# EAGLE board HSTF 2018 - Eagle - V01 (EAGLE 8.5.2)
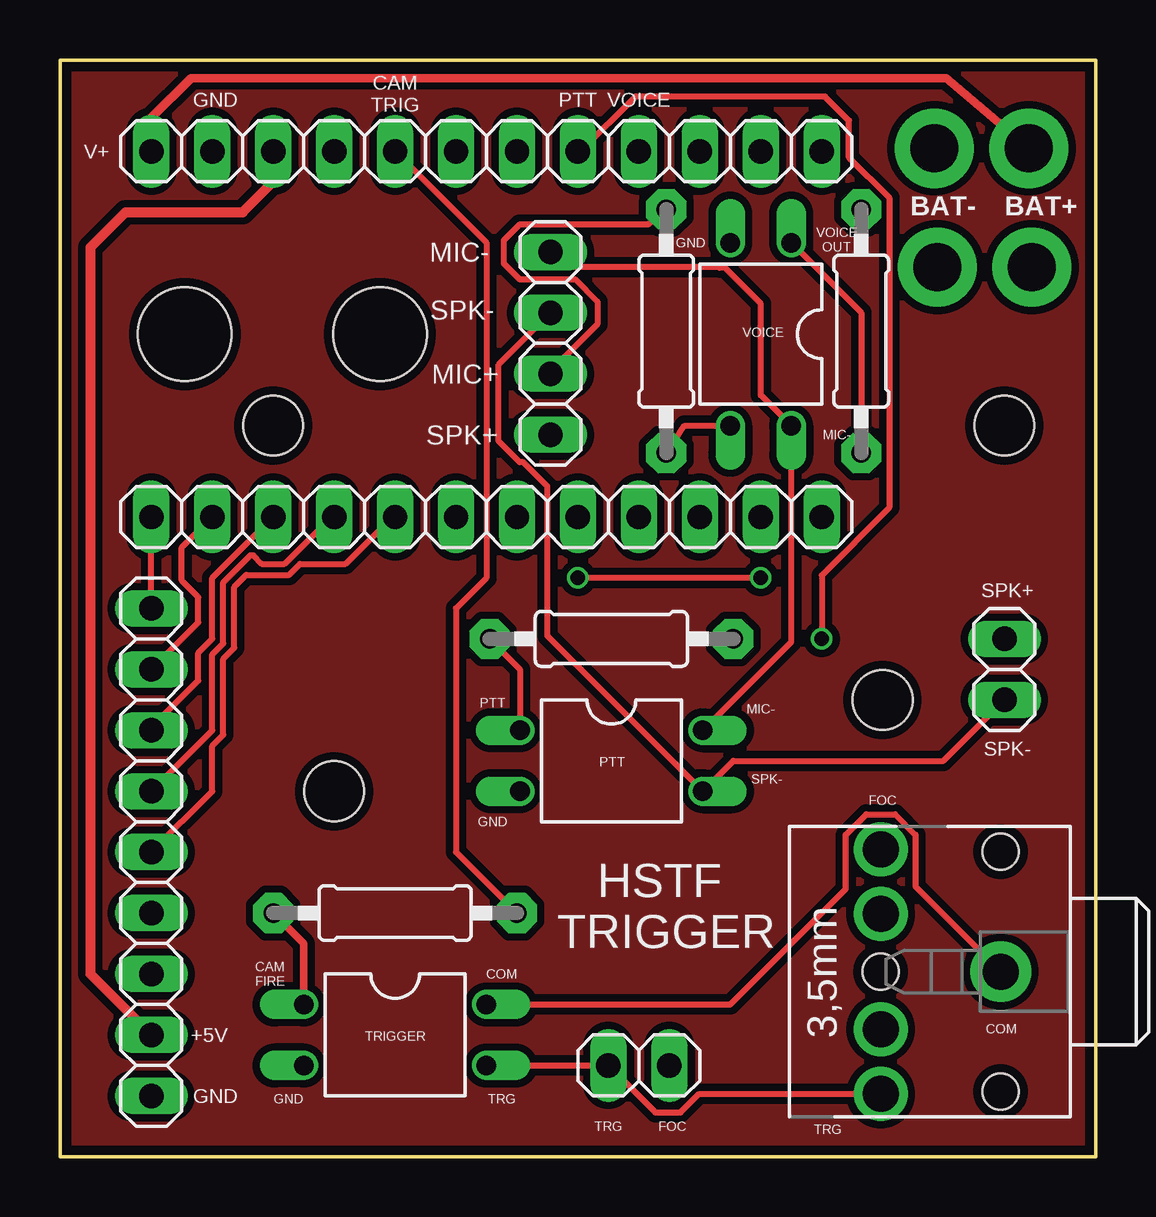
[diagram p0: board, top side]
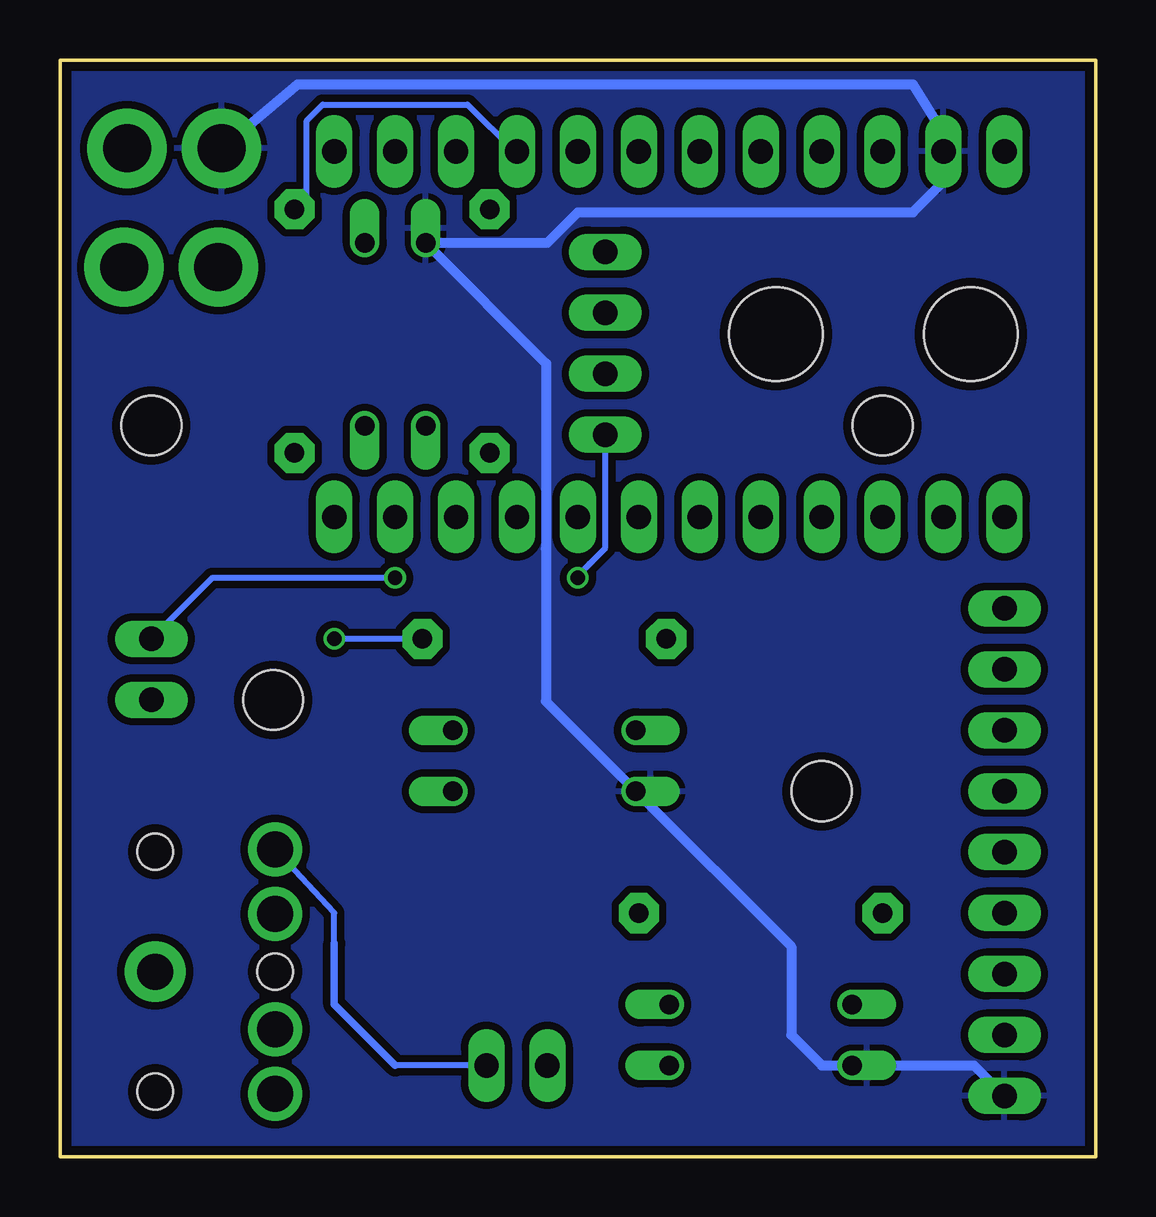
[diagram p1: board, bottom side, seen from below]

Size 43.18 x 45.72 mm. Coordinates in mm from the lower left corner, seen from the top.
Outline: 43.18,0 0,0 0,45.72 43.18,45.72 43.18,0
Copper layers (1*16): Top 0.035559375mm / dielectric 1.6mm / Bottom 0.035559375mm
Design rules "oshpark-2layer": minimum track width 6mil, minimum drill 10mil, track to track 6mil, track to pad 6mil, pad to pad 6mil, via to via 6mil, smd to smd 6mil, copper to edge 15mil, drill to drill 6mil, minimum pad ring 5mil, minimum via ring 5mil, stop-mask expansion 2.5mil, vias tented up to drill 0mil, thermal gap 10mil
Holes 3.9 mm at 5.21,34.29 13.34,34.29
Holes 2.49 mm at 11.43,15.24 34.29,19.05 39.37,30.48 8.89,30.48

## Footprints (pad centres in the part's own frame; a part is rotated, then mirrored left to right if it is on the bottom)
1X01_2MM = drill 2 pad 3.302: 1 0,0
STX3100 = drill 1.5 pad 2.54: 1 2.7,-0.1 | drill 1.5: 2 7.7,5; 3 7.7,2.3; 4 7.7,-2.5; 5 7.7,-5.2 | hole 1.5: 2.7,4.9; 2.7,-5.1; 7.7,-0.1
1X02 = drill 1.016 long: 1 -1.27,0; 2 1.27,0
1X09 = drill 1.016 long: 1 -10.16,0; 2 -7.62,0; 3 -5.08,0; 4 -2.54,0; 5 0,0; 6 2.54,0; 7 5.08,0; 8 7.62,0; 9 10.16,0
1X12 = drill 1.016 long: 1 -13.97,0; 2 -11.43,0; 3 -8.89,0; 4 -6.35,0; 5 -3.81,0; 6 -1.27,0; 7 1.27,0; 8 3.81,0; 9 6.35,0; 10 8.89,0; 11 11.43,0; 12 13.97,0
DIL04 = drill 0.813 offset: 1 -1.27,-3.81; 2 1.27,-3.81; 3 1.27,3.81; 4 -1.27,3.81
0207/10 = drill 0.813 pad 1.676 octagon: 1 -5.08,0; 2 5.08,0
1X04 = drill 1.016 long: 1 -3.81,0; 2 -1.27,0; 3 1.27,0; 4 3.81,0

## Placement (x,y rotation side)
BAT+  [1X01_2MM]  40.39,42.04 270 top
BAT-  [1X01_2MM]  36.45,42.04 270 top
CAMERA_CABLE  STEREOJACK  [STX3100]  41.91,7.62 180 top
DTMF_AUDIO_IN  Female  [1X02]  39.37,20.32 270 top
DTMF_MODULE  Female  [1X09]  3.81,12.7 270 top
FOCUS_SW  Female  [1X02]  24.13,3.81 180 top
LEFT  [1X12]  17.78,26.67 0 top
PTT  PC817  [DIL04]  22.99,16.51 270 top
R1  220  [0207/10]  13.97,10.16 180 top
R2  220  [0207/10]  22.99,21.59 180 top
R3  220  [0207/10]  33.4,34.42 270 top
R4  2.2K  [0207/10]  25.27,34.42 270 top
RADIO  Female  [1X04]  20.45,33.91 90 top
RIGHT  [1X12]  17.78,41.91 0 top
STRAIN  [1X01_2MM]  40.51,37.08 90 top
STRAIN1  [1X01_2MM]  36.58,37.08 90 top
TRIGGER  PC817  [DIL04]  13.97,5.08 270 top
VOICE  PC817  [DIL04]  29.21,34.29 180 top

## Library data of the parts
BAT+ BAT- STRAIN STRAIN1 = SparkFun-Connectors
CAMERA_CABLE R1-R4 = adafruit
DTMF_AUDIO_IN DTMF_MODULE FOCUS_SW RADIO = pinhead
LEFT RIGHT = pinhead; SPICEPREFIX: X
PTT TRIGGER VOICE = optocoupler; MPN: PC817X4J000F; OC_FARNELL: 9707727; OC_NEWARK: 97K7059

## Nets
5: RIGHT.7
6: RIGHT.6
COMMON: CAMERA_CABLE.1 TRIGGER.4
FOCUS: CAMERA_CABLE.5 FOCUS_SW.1
GND: BAT-.1 DTMF_MODULE.9 PTT.2 RIGHT.2 TRIGGER.2 VOICE.2
MIC+: R4.1 RADIO.2
MIC-: PTT.4 RADIO.4 VOICE.4
N$1: LEFT.6
N$2: LEFT.7
N$3: LEFT.8
N$4: LEFT.9
N$5: LEFT.10
N$9: R3.2 VOICE.1
N$10: PTT.1 R2.2
N$12: R4.2 VOICE.3
N$13: LEFT.11
N$14: LEFT.12
N$22: RIGHT.10
N$23: RIGHT.11
N$24: RIGHT.12
OOPS: R1.2 TRIGGER.1
PTT: R2.1 RIGHT.8
Q1: DTMF_MODULE.1 LEFT.1
Q2: DTMF_MODULE.2 LEFT.2
Q3: DTMF_MODULE.3 LEFT.3
Q4: DTMF_MODULE.4 LEFT.4
SP+: DTMF_AUDIO_IN.1 RADIO.1
SP-: DTMF_AUDIO_IN.2 PTT.3 RADIO.3
ST_Q: DTMF_MODULE.5 LEFT.5
TRIGGER: CAMERA_CABLE.2 FOCUS_SW.2 TRIGGER.3
TRIGGER_CTL: R1.1 RIGHT.5
V+: BAT+.1 RIGHT.1
VBUS: DTMF_MODULE.8 RIGHT.3
VCC: RIGHT.4
VOICE: R3.1 RIGHT.9

## Tracks (layer width: path | path; a pad name or v marks a point on that pad's centre or on a via)
COMMON
  Top 0.254: TRIGGER.4 27.94,6.35 32.76,11.16 32.76,13.42 33.61,14.28 34.81,14.28 35.66,13.42 35.66,11.27 CAMERA_CABLE.1
FOCUS
  Bottom 0.254: FOCUS_SW.1 29.21,3.81 | 31.75,8.89 31.75,10.16 CAMERA_CABLE.5
  Bottom 0.305: 29.21,3.81 31.75,6.35 31.75,8.89
GND
  Bottom 0.406: DTMF_MODULE.9 5.08,3.81 TRIGGER.2 11.43,3.81 12.7,5.08 12.7,8.76 PTT.2 22.92,18.99 22.92,25.34 22.91,25.35 22.91,33.07 VOICE.2 | BAT-.1 33.27,44.7 7.62,44.7 6.35,42.67 RIGHT.2 6.35,40.64 7.62,39.37 21.59,39.37 22.86,38.1 VOICE.2 | 27.86,38.18 VOICE.2
  pour Bottom (isolate 0.305): 0,0 0,45.72 43.18,45.72 43.18,0
MIC+
  Top 0.254: RADIO.2 20.45,32.75 22.4,34.71 22.4,35.65 21.48,36.58 19.16,36.58 18.49,37.25 18.49,38.19 19.16,38.86 24.51,38.86 R4.1
MIC-
  Top 0.254: RADIO.4 21.08,37.08 27.48,37.08 27.51,37.06 27.71,37.06 29.21,35.56 29.21,31.75 VOICE.4 30.48,21.46 PTT.4
N$6
  pour Top (isolate 0.305): 0,0 0,45.72 43.18,45.72 43.18,0
N$9
  Top 0.254: VOICE.1 33.4,35.18 R3.2
N$10
  Top 0.254: R2.2 19.18,20.32 PTT.1
N$12
  Top 0.254: R4.2 26.04,30.48 VOICE.3
OOPS
  Top 0.305: R1.2 10.16,8.89 TRIGGER.1
PTT  (via drill 0.6)
  Top 0.254: 21.89,41.91 RIGHT.8 21.7,41.91 23.99,44.2 31.89,44.2 32.89,43.2 32.89,41.66 34.57,39.98 34.57,27.06 31.75,24.24 v31.75,21.59
  Bottom 0.254: R2.1 v31.75,21.59
Q1
  Top 0.254: DTMF_MODULE.1 LEFT.1
Q2
  Top 0.254: DTMF_MODULE.2 5.77,22.28 5.77,23.33 5.08,24.02 5.08,25.4 LEFT.2
Q3
  Top 0.254: DTMF_MODULE.3 3.81,17.89 5.77,19.85 5.77,21.01 6.35,21.59 6.35,24.13 LEFT.3
Q4
  Top 0.254: DTMF_MODULE.4 6.35,17.78 6.35,20.94 6.81,21.4 6.81,23.94 7.94,25.08 8.05,25.08 8.42,24.71 9.36,24.71 11.32,26.67 LEFT.4
SP+  (via drill 0.6)
  Top 0.254: v29.21,24.13 v21.59,24.13
  Bottom 0.254: v29.21,24.13 36.83,24.13 DTMF_AUDIO_IN.1 | RADIO.1 20.45,25.38 21.12,24.71 21.59,24.24 v21.59,24.13
SP-
  Top 0.254: RADIO.3 18.29,33.02 18.29,29.83 19.16,28.96 19.3,28.96 20.32,27.94 20.32,21.72 PTT.3 28.07,16.51 36.83,16.51 DTMF_AUDIO_IN.2
ST_Q
  Top 0.254: DTMF_MODULE.5 6.35,15.24 6.35,17.13 6.81,17.59 6.81,20.75 7.26,21.21 7.26,23.75 7.77,24.26 9.55,24.26 10.01,24.71 11.9,24.71 13.86,26.67 LEFT.5
TRIGGER
  Top 0.254: CAMERA_CABLE.2 26.64,2.62 25.87,1.85 24.82,1.85 FOCUS_SW.2 TRIGGER.3
TRIGGER_CTL
  Top 0.254: RIGHT.5 17.78,38.1 17.78,24.13 16.51,22.86 16.51,12.7 R1.1
V+
  Top 0.356: BAT+.1 36.96,44.96 5.46,44.96 3.81,43.31 RIGHT.1
VBUS
  Top 0.406: RIGHT.3 8.89,40.64 7.62,39.37 2.74,39.37 1.27,37.9 1.27,7.62 DTMF_MODULE.8
VOICE
  Bottom 0.254: R3.1 32.89,40.01 32.89,43.2 32.22,43.87 26.2,43.87 24.24,41.91 RIGHT.9

## Text on the board
tPlace: GND | CAM / TRIG | PTT | VOICE | V+ | MIC- | GND | VOICE / OUT | SPK- | MIC+ | SPK+ | MIC- | SPK+ | PTT | MIC- | SPK- | SPK- | FOC | GND | HSTF / TRIGGER | CAM / FIRE | COM | +5V | COM | GND | GND | TRG | TRG | FOC | TRG